# Altium PCB DS137-1.0-C二氧化硫传感器.PcbDoc
Units mm, origin at the board's own origin, x right, y up, seen from the top; angles counter-clockwise.
Board outline 17.5 x 17.5 mm, 2 copper layers (Top Layer, Bottom Layer); 14 components, 35 nets, 39 pads, 12 vias.
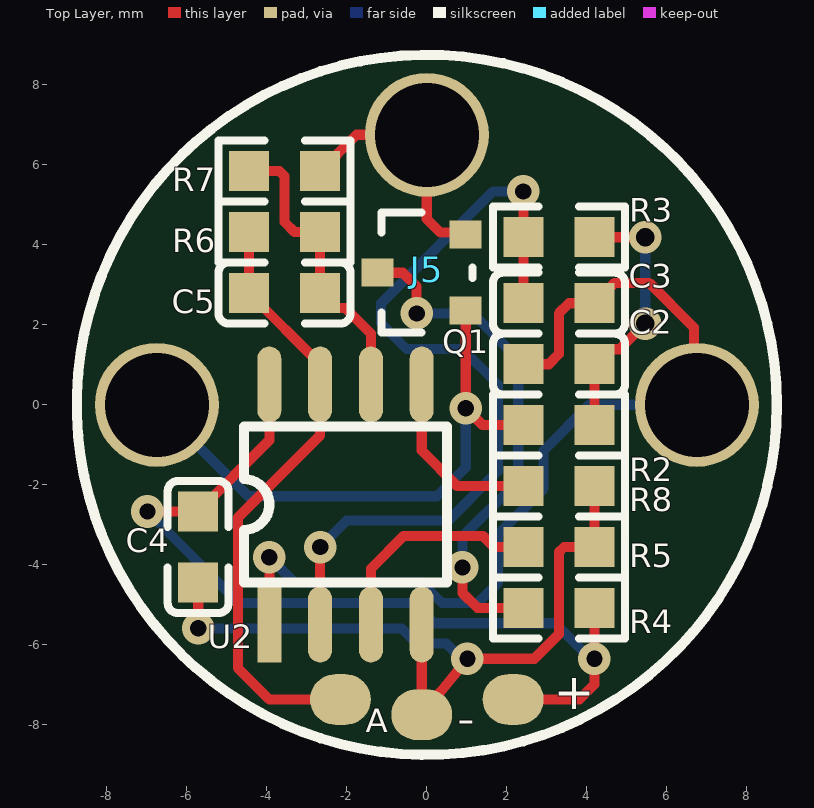
[diagram p0: Top Layer view]
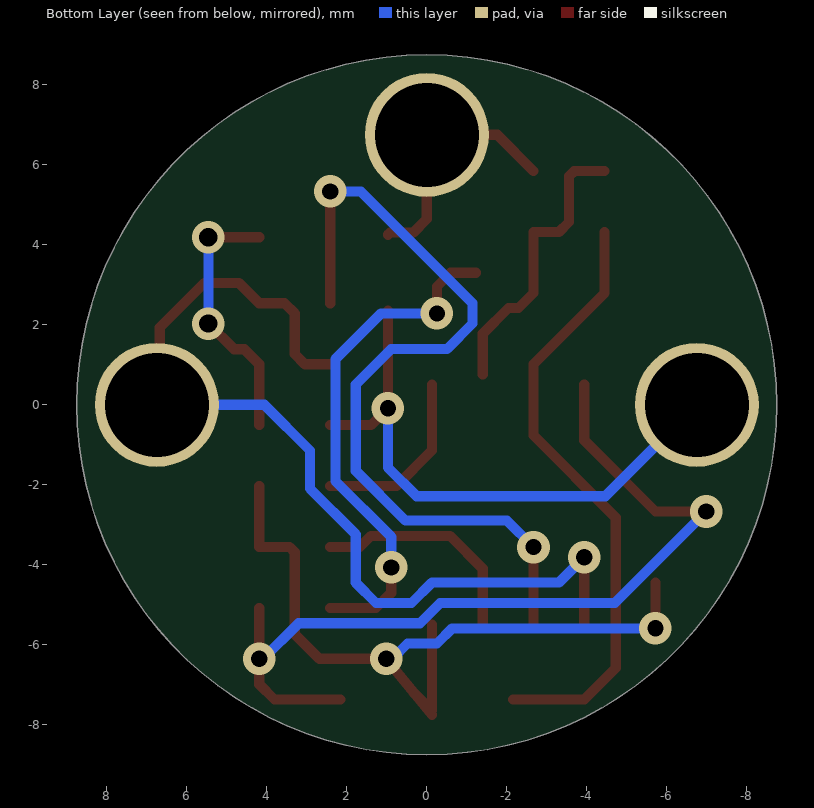
[diagram p1: Bottom Layer view, seen from below]
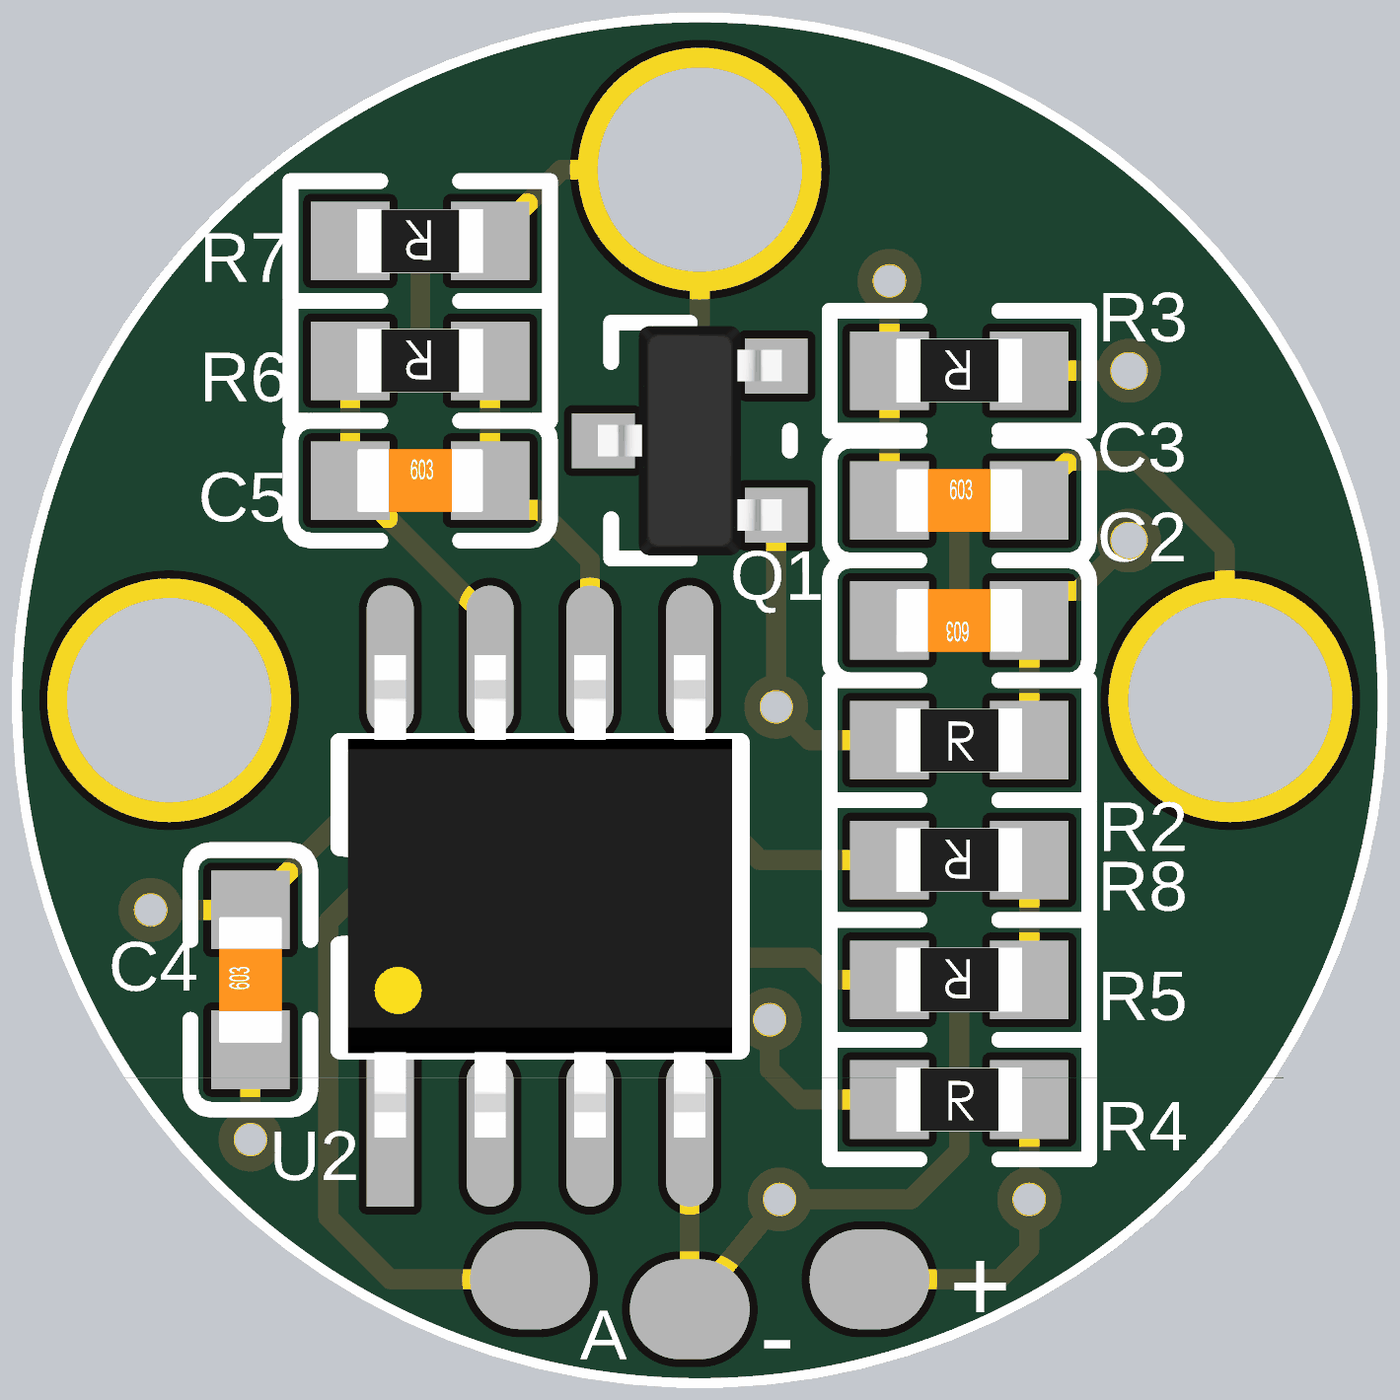
[diagram p2: 3D render of the assembled board from above, using the file's embedded part models]

## Layer stack, top to bottom
Top Solder: solder mask 0.0102, Solder Resist, Dk 3.5
Top Layer: signal copper 0.0356
Dielectric 1: dielectric 0.32, FR-4, Dk 4.8
Bottom Layer: signal copper 0.0356
Bottom Solder: solder mask 0.0102, Solder Resist, Dk 3.5

## Board outline
-8.75,0 ccw(c0,0) 0,-8.75 ccw(c0,0) 8.75,0 ccw(c0,0) 0,8.75 ccw(c0,0)

## Design rules (kind name [scope] priority, off if disabled: settings)
Clearance [All] p1: gap=0.254 ignorepadtopadclearanceinfootprint=FALSE except(0: Arc-Hole Track-Hole SMDPad-Hole THPad-Hole Via-Hole Fill-Hole Poly-Hole Region-Hole Text-Hole)
PolygonConnect [All] p1: connectstyle=Relief reliefconductorwidth=0.254 reliefentries=4 polygonreliefangle="90 Angle" airgapwidth=0.254
RoutingVias [All] p1: holewidth=0.711 width=1.27 viastyle="Through Hole" minholewidth=0.711 minwidth=1.27 maxholewidth=0.711 maxwidth=1.27
SolderMaskExpansion [All] p1: expansion=0.102 istentingtop=FALSE
Width [All] p1: maxlimit=0.254 minlimit=0.254 preferedwidth=0.254
30 further rules are at their usual default settings.

## Components (designator, comment, footprint, x,y, rotation, side; value= is the part's Value field where it differs from the comment)
C2 "SMDCAP00010" 0603CAP 3.302,1.016 r180 top value=10nF
C3 "SMDCAP00008" 0603CAP 3.302,2.54 r0 top value=1nF
C4 "SMDCAP00013" 0603CAP -5.715,-3.557 r90 top value=100nF
C5 "SMDCAP00010" 0603CAP -3.556,2.794 r0 top value=10nF
J5 "SL000000042" 3_Electrode 0,0 r0 top locked value=三电极传感器
Q1 "MMBFJ177LT1G" SOT23 -0.127,3.302 r90 top
R2 "SMDRES00056" 0603RES 3.302,-0.508 r0 top value=10K
R3 "SMDRES00056" 0603RES 3.302,4.191 r180 top value=10K
R4 "SMDRES00085" 0603RES 3.302,-5.08 r0 top value=1M
R5 "SMDRES00056" 0603RES 3.302,-3.556 r180 top value=10K
R6 "SMDRES00108" 0603RES -3.556,4.318 r180 top value=22K
R7 "SMDRES00005" 0603RES -3.556,5.842 r180 top value=10R
R8 "SMDRES00056" 0603RES 3.302,-2.032 r180 top value=10K
U2 "OPA2192" SO-8 -2.032,-2.492 r90 top

## Footprints (in the part's own frame and the unit in brackets; to place one, negate y for a bottom-side part, rotate by r counter-clockwise, add the part's x,y. Pads: shape width x height; smd on the part's side, far side on the other; paste and mask are expansions set on the pad)
3_Electrode [mm]
  round 3.1 hole 2.6: 1(6.75,0) 2(-6.75,0) 3(0,6.75)
  silkscreen extent -8.75,-8.75 8.75,8.75
0603CAP [mm]
  rect 1x1 smd: 1(-0.889,0) 2(0.89,0)
  silkscreen extent -1.65,-0.76 1.65,0.76, body extent -0.8,-0.4 0.8,0.4, height 0.3
0603RES [mm]
  rect 1x1 smd: 1(-0.889,0) 2(0.889,0)
  silkscreen extent -1.65,-0.76 1.65,0.76, body extent -0.8,-0.41 0.8,0.41, height 0.51
SO-8 [mm]
  rect 1.9x0.6 smd: 1(-3,1.905)
  oval 1.9x0.6 smd: 2(-3,0.635) 3(-3,-0.635) 4(-3,-1.905) 5(3,-1.905) 6(3,-0.635) 7(3,0.635) 8(3,1.905)
  silkscreen extent -1.95,-2.54 1.95,2.54, body extent -3.07,-2.44 3.07,2.44, height 1.77
SOT23 [mm]
  rect 0.7x0.8 smd: 1(-0.95,-1.1) 2(0.95,-1.1) 3(0,1.1)
  silkscreen extent -1.5,-1.27 1.5,1, body extent -1.46,-1.17 1.46,1.17, height 1

## Part data
C2 C5: library part "MLCC 10nF 50V ±10％ 0603", "贴片电容"
C3: library part "MLCC 1nF 50V ±10％ 0603", "贴片电容"
C4: library part "MLCC 100nF 50V ±10％ 0603", "贴片电容"
J5: library part "DIP3 单排直针 间距2.54mm 针长11mm 铜", "单排直针"
Q1: library part J177, "P沟道JFET 结型场效应管(JFET) 适用于模拟开关和斩波器应用。"
R2 R3 R5 R8: library part "Chip 10K 1/16W ±1％ 0603", "贴片电阻"
R4: library part "Chip 1M 1/16W ±1％ 0603", "贴片电阻"
R6: library part "Chip 22K 1/16W ±1％ 0603", "贴片电阻"
R7: library part "Chip 10R 1/16W ±1％ 0603", "贴片电阻"
U2: library part TL062C

## Free pads (board coordinates)
  oval 1.524x1.27 smd: 1(-2.159,-7.366) 2(-0.127,-7.747) 3(2.159,-7.366)

## Via types
v1: diameter 0.813, hole 0.406, Top Layer to Bottom Layer, tented both sides, 10 vias
v2: diameter 0.813, hole 0.457, Top Layer to Bottom Layer, tented both sides, 2 vias

## Nets (pads, with @x,y where several pads share a name; then routed paths per layer and width w, separated by ;. In a path a pad name is that pad's centre, name@x,y a point inside that pad or via, vN(x,y) a via of type N, cw(c..) or ccw(c..) an arc to the next point about the centre after c; other vN are vias at no path point)
ADC0: C5.1 pad.1 R6.2 U2.7 | length 15.4
  Top Layer w0.254: R6.2 C5.1 -2.667,1.016 U2.7 -2.667,-0.762 -4.724,-2.819 -4.724,-6.579 -3.937,-7.366 pad.1
ADC1: 
DAC_OUT: 
Dis_blue_EN: 
Dis_green_EN: 
Dis_red_EN: 
GND: C4.1 pad.2 R5.1 R8.1 U2.4 | length 19.9
  Top Layer w0.254: v1(-5.715,-5.588) C4.1 ; pad.2 0.336,-7.182 ; U2.4 -0.127,-7.644 0.336,-7.182 ; R8.1 R5.1 3.429,-3.556 3.302,-3.683 3.302,-5.734 2.686,-6.35 v1(1.016,-6.35) 0.336,-7.182
  Bottom Layer w0.254: v1(-5.715,-5.588) -0.635,-5.588 -0.254,-5.969 0.484,-5.969 0.865,-6.35 v1(1.016,-6.35)
I2C1_SCL: 
I2C1_SDA: 
KEY_HOME: 
LED_blue: 
LED_green: 
LED_red: 
NetC2_1: C2.1 R2.2 R3.1 | length 6.6
  Top Layer w0.254: R2.2 C2.1 4.564,1.389 4.818,1.389 v2(5.461,2.032) ; R3.1 v2(5.461,4.191)
  Bottom Layer w0.254: v2(5.461,2.032) v2(5.461,4.191)
NetC2_2: C2.2 C3.2 J5.1 U2.1 | length 24.3
  Top Layer w0.254: U2.1 v1(-3.937,-3.81) ; C2.2 3.048,1.016 3.302,1.27 3.302,2.286 3.556,2.54 C3.2 4.7,3.048 5.559,3.048 6.676,1.931 6.676,0.074 J5.1
  Bottom Layer w0.254: v1(-3.937,-3.81) -3.302,-4.445 -0.127,-4.445 0.381,-4.953 1.27,-4.953 1.778,-4.445 1.778,-3.239 2.921,-2.096 2.921,-1.143 4.064,0 J5.1
NetC3_1: C3.1 R3.2 U2.2 | length 20.9
  Top Layer w0.254: U2.2 v1(-2.667,-3.556) ; C3.1 R3.2 v1(2.413,5.334)
  Bottom Layer w0.254: v1(-2.667,-3.556) -2.007,-2.896 0.533,-2.896 1.778,-1.651 1.778,0.508 0.889,1.397 -0.508,1.397 -1.143,2.032 -1.143,2.54 1.651,5.334 v1(2.413,5.334)
NetC5_2: C5.2 R6.1 R7.2 U2.6 | length 7.3
  Top Layer w0.254: R7.2 -3.683,5.842 -3.556,5.715 -3.556,4.572 -3.302,4.318 R6.1 C5.2 -2.293,2.421 -2.04,2.421 -1.397,1.778 U2.6@-1.397,0.762
NetJ5_2: J5.2 Q1.1 R2.1 | length 14.5
  Top Layer w0.254: Q1.1 v1(0.973,-0.084) 1.397,-0.508 R2.1
  Bottom Layer w0.254: J5.2 -4.464,-2.286 0.254,-2.286 0.973,-1.567 v1(0.973,-0.084)
NetJ5_3: J5.3 Q1.2 R7.1 | length 6.3
  Top Layer w0.254: R7.1 -1.759,6.75 J5.3 0,4.645 0.341,4.304 0.921,4.304 Q1.2
NetQ1_3: Q1.3 R4.1 | length 12.9
  Top Layer w0.254: Q1.3 -0.6,3.302 -0.254,2.956 v1(-0.254,2.286) ; v1(0.889,-4.064) 0.889,-4.699 1.27,-5.08 R4.1
  Bottom Layer w0.254: v1(-0.254,2.286) 1.143,2.286 2.286,1.143 2.286,-1.905 0.889,-3.302 v1(0.889,-4.064)
NetR5_2: R5.2 U2.3 | length 5.7
  Top Layer w0.254: U2.3 -1.397,-4.095 -0.578,-3.277 1.397,-3.277 1.676,-3.556 R5.2
NetR8_2: R8.2 U2.5 | length 4.6
  Top Layer w0.254: U2.5 -0.127,-1.143 0.762,-2.032 R8.2
NetR?_1: 
NetR?_2: 
NetR?_3: 
SPI2_CS: 
SPI2_MISO: 
SPI2_MOSI: 
SPI2_SCK: 
USART2_RXD: 
USART2_TXD: 
VBUS: 
VCC_3V3_MCU: 
VCC_5V: C4.2 pad.3 R4.2 U2.8 | length 22
  Top Layer w0.254: v1(-6.985,-2.667) C4.2 -3.937,-0.889 U2.8 ; pad.3 3.81,-7.366 4.191,-6.985 v1(4.191,-6.35) R4.2
  Bottom Layer w0.254: v1(-6.985,-2.667) -4.699,-4.953 -0.337,-4.953 0.171,-5.461 3.204,-5.461 4.093,-6.35 v1(4.191,-6.35)
VSS: 

## Other copper
Top Layer:
  pour cut-out: 4.945,4.945 3.078,4.945 2.794,-5.842 3.614,-5.834 3.683,3.302 4.314,3.31 4.953,4.191
  pour cut-out: -1.651,6.985 -4.953,6.985 -5.461,6.477 -5.461,2.159 -4.953,1.651 -2.032,1.651 -1.905,1.524 -1.905,-0.381 -1.778,-0.508 -1.016,-0.508 -0.889,-0.381 -0.889,2.286 -1.524,2.921 -1.524,6.858
Bottom Layer:
  pour cut-out: -1.651,6.985 -4.953,6.985 -5.461,6.477 -5.461,2.159 -4.953,1.651 -2.032,1.651 -1.905,1.524 -1.905,-0.381 -1.778,-0.508 -1.016,-0.508 -0.889,-0.381 -0.889,2.286 -1.524,2.921 -1.524,6.858

## Silkscreen, mask and mechanical layers (free items; w line width, h text height)
Top Overlay:
  text "+" at 3.175,-7.905 h1.52
  text "A" at -1.524,-8.382 h1.02
  text "-" at 0.762,-8.548 h1.52
Mechanical 1:
  circle w0.254: c0,0 r8.75